# EAGLE board strain-gauge-amplifier (EAGLE 7.1.0)
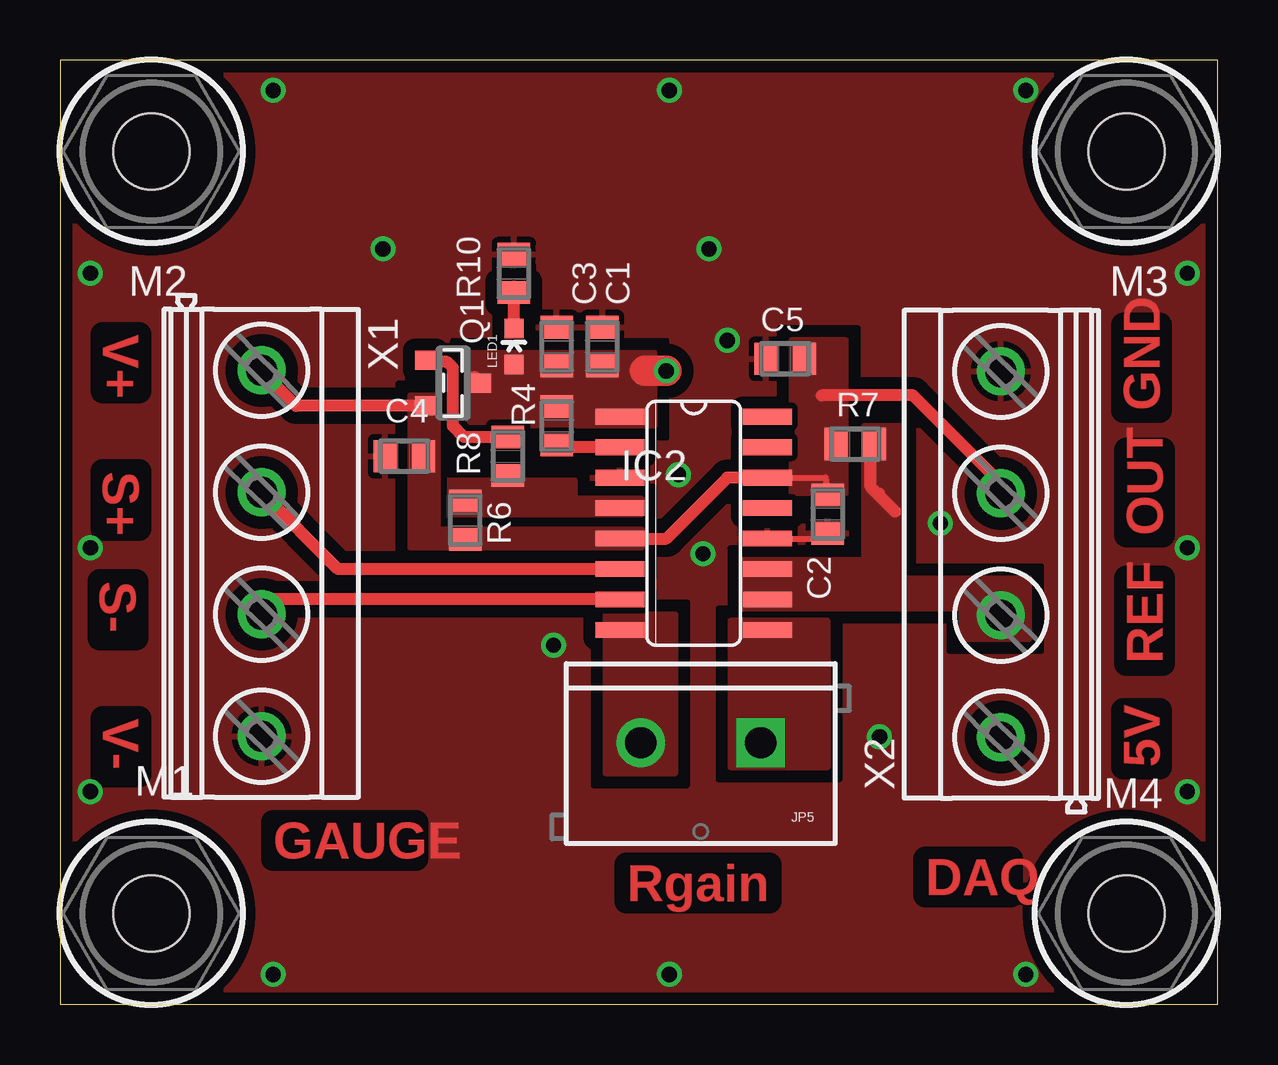
[diagram p0: board, top side]
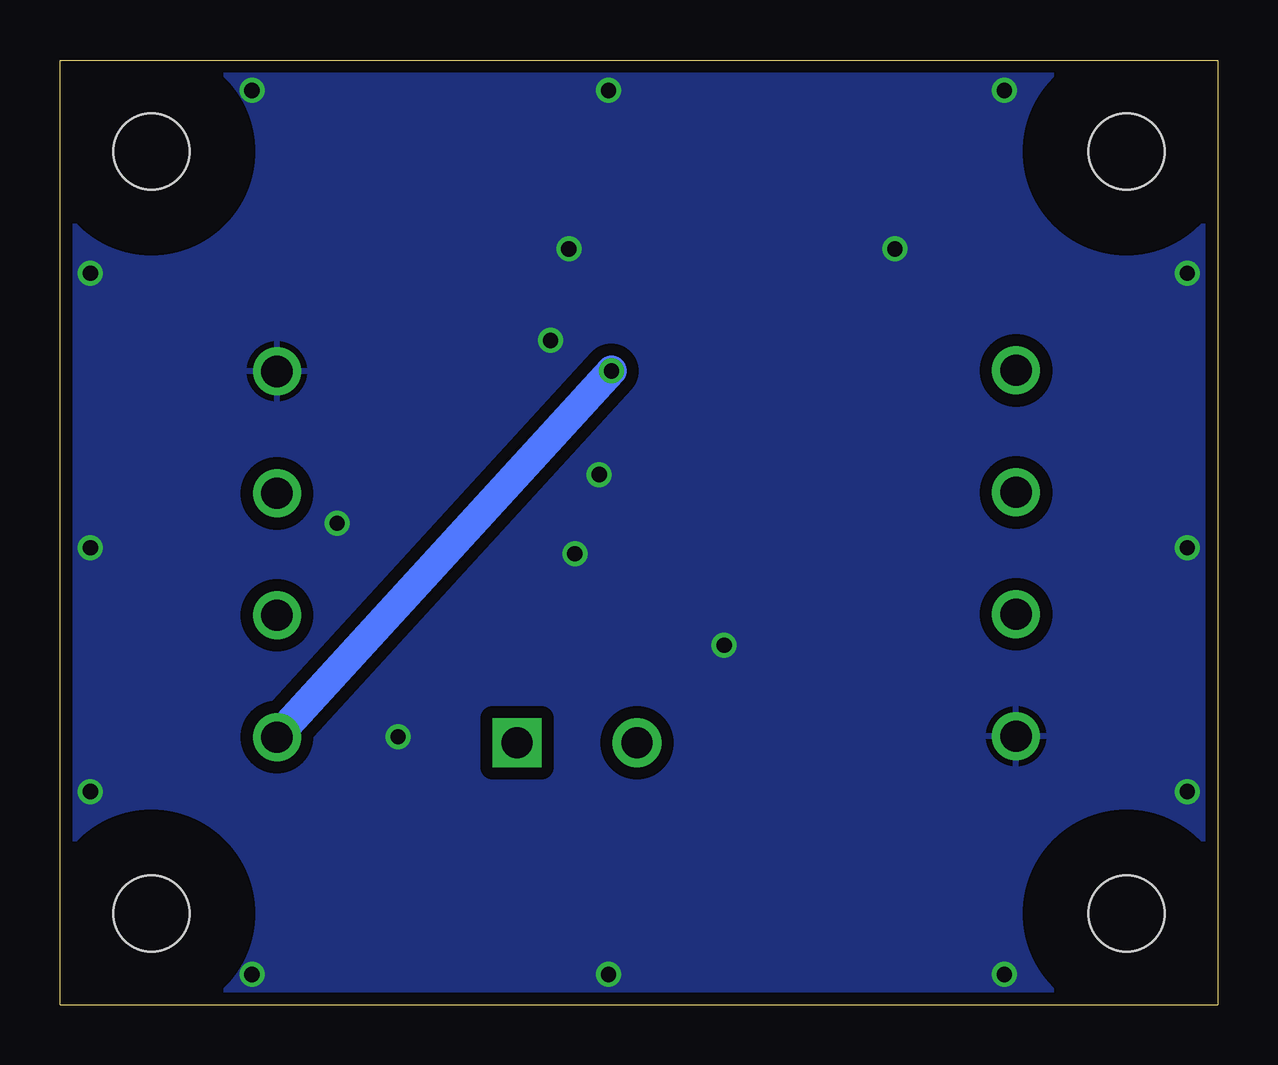
[diagram p1: board, bottom side, seen from below]

Size 48.26 x 39.37 mm. Coordinates in mm from the lower left corner, seen from the top.
Outline: 48.26,0 48.26,39.37 0,39.37 0,0 48.26,0
Copper layers (1*16): Top 0.0178mm / dielectric 59mil / Bottom 0.0178mm
Design rules "epl-lpkf": minimum track width 8mil, minimum drill 0.35mm, track to track 8mil, track to pad 8mil, pad to pad 8mil, via to via 8mil, smd to smd 8mil, copper to edge 15mil, drill to drill 15mil, minimum pad ring 8mil, minimum via ring 8mil, stop-mask expansion 3mil, vias tented up to drill 0mil, thermal gap 10mil
bRestrict: area 0,31.8 to 7.6,39.4; area 40.6,31.8 to 48.3,39.4; area 40.6,0 to 48.3,7.6; area 0,0 to 7.6,7.6

## Footprints (pad centres in the part's own frame; a part is rotated, then mirrored left to right if it is on the bottom)
0805-C-NOSILK = smd 0.95 x 1.35: 1 -0.8,0; 2 0.8,0
SO16 = smd 0.66 x 2.032: 1 -4.445,-3.073; 2 -3.175,-3.073; 3 -1.905,-3.073; 4 -0.635,-3.073; 5 0.635,-3.073; 6 1.905,-3.073; 7 3.175,-3.073; 8 4.445,-3.073; 9 4.445,3.073; 10 3.175,3.073; 11 1.905,3.073; 12 0.635,3.073; 13 -0.635,3.073; 14 -1.905,3.073; 15 -3.175,3.073; 16 -4.445,3.073
SCREWTERMINAL-5MM-2 = drill 1.3 pad 2.032 square: 1 0,0 | drill 1.3 pad 2.032: 2 5,0
LED-0603 = smd 0.8 x 0.8: A 0,-0.75; C 0,0.75
#4/.300-BARE+STD_NUT_OR_STAR_WASHER = hole 3.175: 0,0
SOT23 = smd 0.787 x 0.889: 1 -0.953,-1.143; 2 0.953,-1.143; 3 0,1.143
MKDSN1,5/4-5,08 = drill 1.3 pad 2: 1 -7.641,0.025; 2 -2.561,0.025; 3 2.519,0.025; 4 7.599,0.025

## Placement (x,y rotation side)
C1  1uF  [0805-C-NOSILK]  22.61,27.43 90 top
C2  100n  [0805-C-NOSILK]  32,20.45 270 top
C3  100n  [0805-C-NOSILK]  20.7,27.43 90 top
C4  100n  [0805-C-NOSILK]  14.35,22.86 180 top
C5  100n  [0805-C-NOSILK]  30.23,26.92 180 top
IC2  INA125  [SO16]  26.42,20.07 270 top
JP5  Rg  [SCREWTERMINAL-5MM-2]  29.21,10.92 180 top
LED1  2.1V/20mA  [LED-0603]  18.92,27.43 0 top
M1  #4-BARE_MOUNTING_HOLE/.300  [#4/.300-BARE+STD_NUT_OR_STAR_WASHER]  3.81,3.81 0 top
M2  #4-BARE_MOUNTING_HOLE/.300  [#4/.300-BARE+STD_NUT_OR_STAR_WASHER]  3.81,35.56 0 top
M3  #4-BARE_MOUNTING_HOLE/.300  [#4/.300-BARE+STD_NUT_OR_STAR_WASHER]  44.45,35.56 0 top
M4  #4-BARE_MOUNTING_HOLE/.300  [#4/.300-BARE+STD_NUT_OR_STAR_WASHER]  44.45,3.81 0 top
Q1  PMV45EN  [SOT23]  16.38,25.91 270 top
R4  1k  [0805-C-NOSILK]  20.7,24.13 90 top
R6  NP (0)  [0805-C-NOSILK]  16.89,20.19 270 top
R7  NP (10k)  [0805-C-NOSILK]  33.15,23.37 0 top
R8  100  [0805-C-NOSILK]  18.67,22.86 90 top
R10  1k  [0805-C-NOSILK]  18.92,30.48 270 top
X1  MKDSN1,5/4-5,08  [MKDSN1,5/4-5,08]  8.38,18.8 270 top
X2  MKDSN1,5/4-5,08  [MKDSN1,5/4-5,08]  39.24,18.8 90 top

## Library data of the parts
C1-C5 R4 R6-R8 R10 = rcl_custom
IC2 = burr-brown
JP5 = SparkFun-Connectors
LED1 = SparkFun-LED
M1-M4 = mount
Q1 = Q_PMV45EN_N_ch_MOSFET
X1 X2 = con-phoenix-508

## Nets
2.5VREF: C2.1 C4.1 C5.1 IC2.5 IC2.14 Q1.2 R6.2 R7.1 X1.1 X2.3
5V: C1.1 C3.1 IC2.1 LED1.A Q1.3 R4.2 X2.1
GND: C1.2 C2.2 C3.2 C4.2 C5.2 IC2.3 IC2.12 R10.1 X1.4 X2.4
N$2: IC2.7 X1.3
N$3: IC2.9 JP5.1
N$5: IC2.8 JP5.2
N$6: Q1.1 R8.2
N$8: IC2.2 R4.1
N$11: LED1.C R10.2
VIN+: IC2.6 X1.2
VOUT: IC2.10 IC2.11 R7.2 X2.2
VREFOUT: IC2.4 R6.1 R8.1

## Tracks (layer width: path | path; a pad name or v marks a point on that pad's centre or on a via)
2.5VREF
  Top 0.254: IC2.14 31.91,21.97 C2.1 | 8.38,26.42 8.41,26.42 X1.1
  Top 0.508: IC2.14 27.81,21.97 25.27,19.43 IC2.5 | Q1.2 9.84,24.96 8.38,26.42 | X2.3 39.22,21.74 35.56,25.4 31.75,25.4
  pour Top (isolate 0.254, no thermals): 24.26,19.05 14.61,19.05 14.61,25.4 15.75,25.4 15.75,19.81 24.26,19.81
  pour Top (isolate 0.254, rank 2, no thermals): 30.48,21.34 32.77,21.34 32.77,27.69 30.48,27.69
5V  (via drill 0.64)
  Top 0.508: 17.27,26.16 Q1.3
  Top 1.27: v25.27,26.42 24.38,26.42
  Bottom 1.27: X2.1 39.22,11.2 v25.27,26.42
  pour Top (isolate 0.254, no thermals): 16.89,27.18 24.77,27.18 24.77,24.13 16.89,24.13
GND  (via drill 0.64)
  Top 0.254: IC2.12 32,19.43 C2.2
  other vias: 27.05,31.5 25.78,22.1 26.8,18.8 27.81,27.69 34.16,11.18 46.99,8.89 46.99,19.05 46.99,30.48 40.26,38.1 25.4,38.1 8.89,38.1 1.27,30.48 1.27,19.05 1.27,8.89 8.89,1.27 25.4,1.27 40.26,1.27 36.7,20.07 20.57,14.99 13.46,31.5
  pour Bottom (isolate 0.508, rank 5): 0,39.37 48.26,39.37 48.26,0 0,0
  pour Top (isolate 0.508, rank 5): 0,39.37 48.26,39.37 48.26,0 0,0
N$2
  Top 0.508: IC2.7 8.89,16.89 X1.3
N$3
  pour Top (isolate 0.254, no thermals): 32,16 27.94,16 27.94,9.91 32,9.91
N$5
  pour Top (isolate 0.254, no thermals): 25.65,16.26 22.73,16.26 22.73,9.65 25.65,9.65
N$6
  Top 0.508: R8.2 16.85,23.66 16.38,24.13 16.38,26.54 16.13,26.8 15.24,26.8 | 15.24,26.8 15.11,26.92 | 15.24,26.8 Q1.1
N$8
  Top 0.508: IC2.2 20.79,23.24 R4.1
N$11
  Top 0.254: 18.92,29.93 R10.2
  Top 0.508: LED1.C 18.92,29.93
VIN+
  Top 0.508: IC2.6 11.6,18.16 X1.2
VOUT
  Top 0.508: 34.82,20.55 34.1,21.27 | 34.1,21.27 33.78,21.59 33.78,23.33 R7.2 | 34.14,21.32 34.1,21.27
  pour Top (isolate 0.254, no thermals): 35.05,24.13 35.05,17.78 40.39,17.78 40.39,15.24 37.59,15.24 37.59,16.51 28.45,16.51 28.45,18.54 33.53,18.54 33.53,24.13
VREFOUT
  pour Top (isolate 0.254, rank 2, no thermals): 24.26,21.08 21.46,21.08 21.46,21.84 15.88,21.84 15.88,20.45 24.26,20.45

## Text on the board
Top: V+ | GND | S+ | OUT | S- | REF | V- | 5V | GAUGE | DAQ | Rgain